# Altium PCB converter.PcbDoc
Units mm, origin at the board's own origin, x right, y up, seen from the top; angles counter-clockwise.
Board outline 60 x 70 mm, 2 copper layers (Top Layer, Bottom Layer), stack 1.671 mm thick; 16 components, 7 nets, 37 pads, 19 vias.
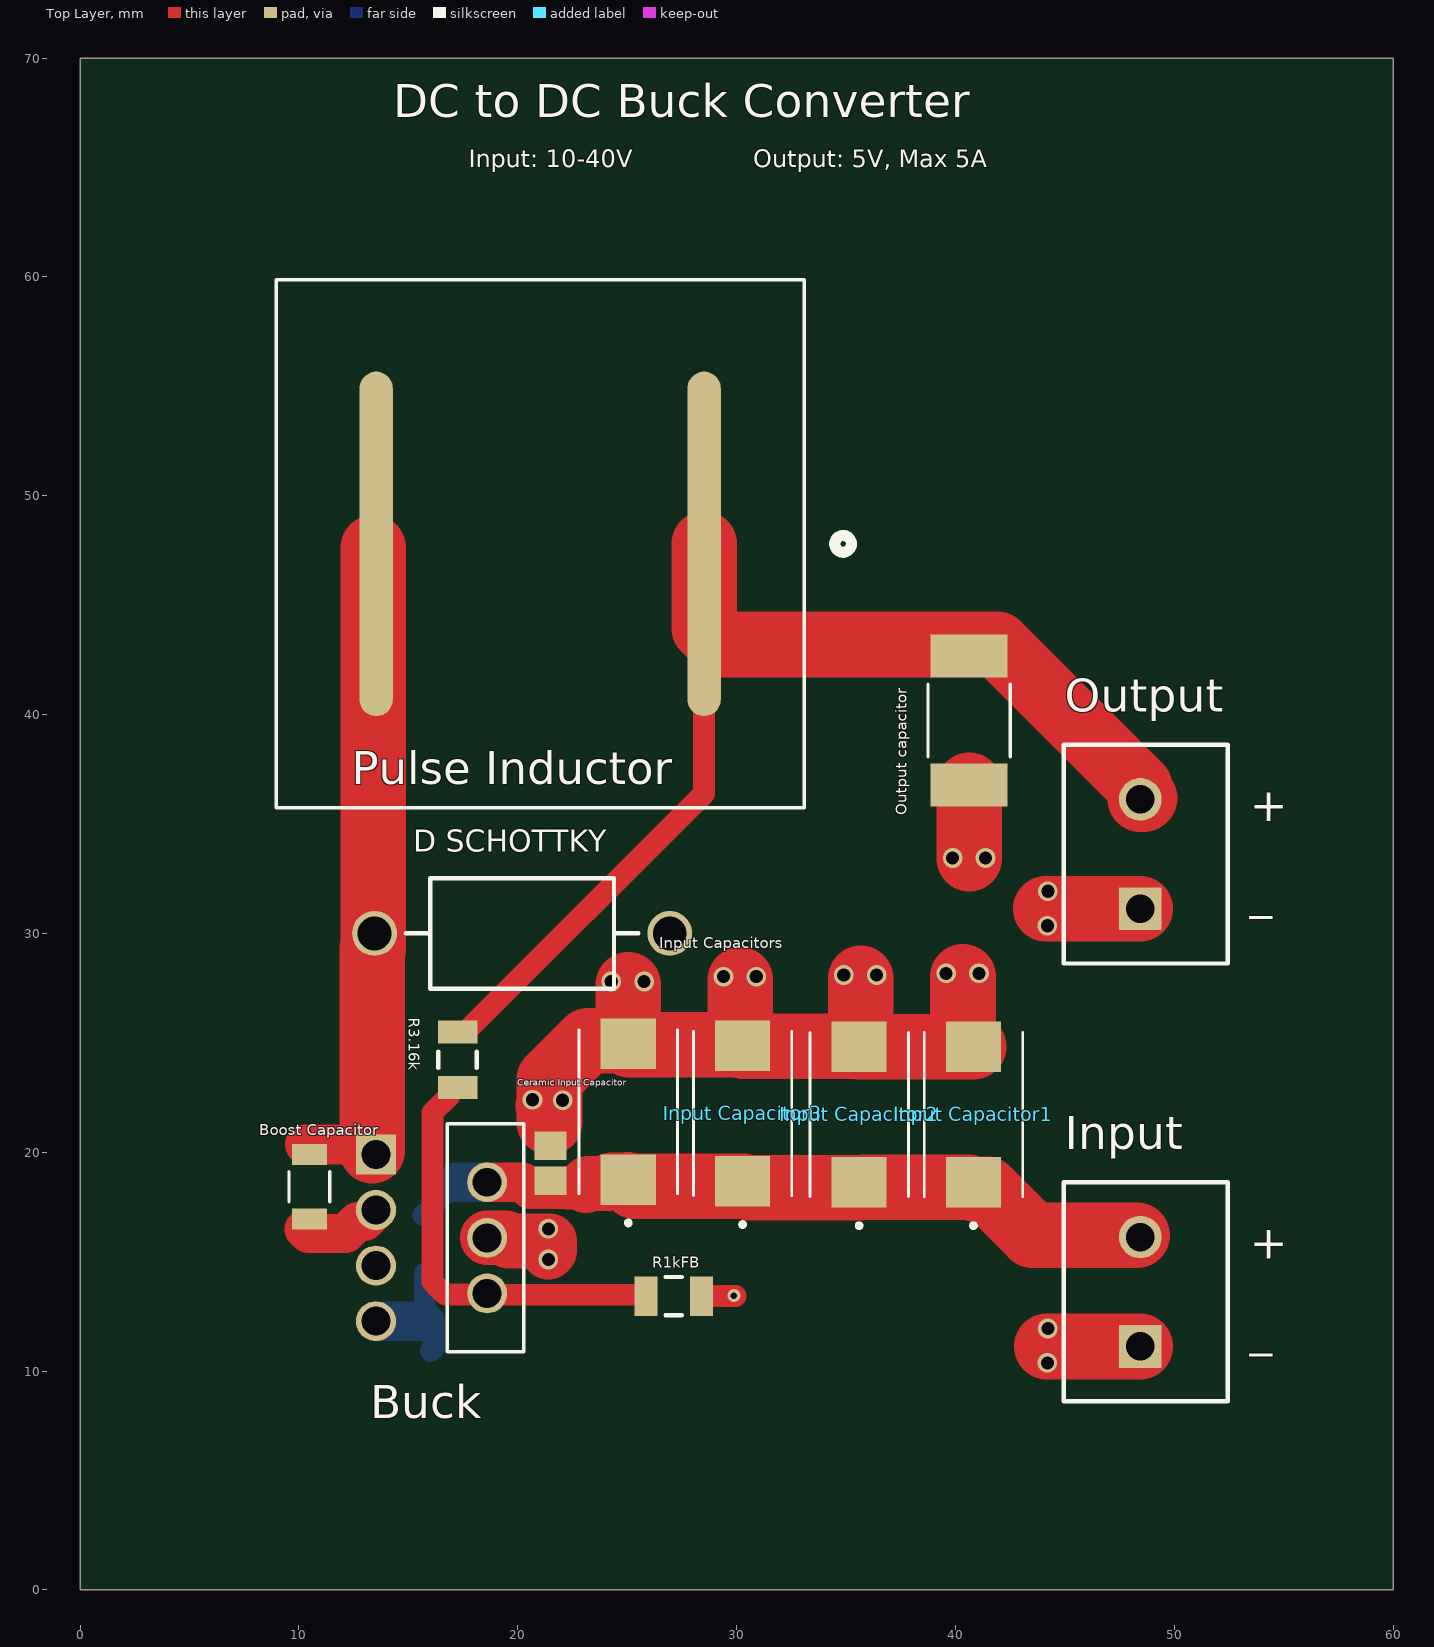
[diagram p0: Top Layer view]
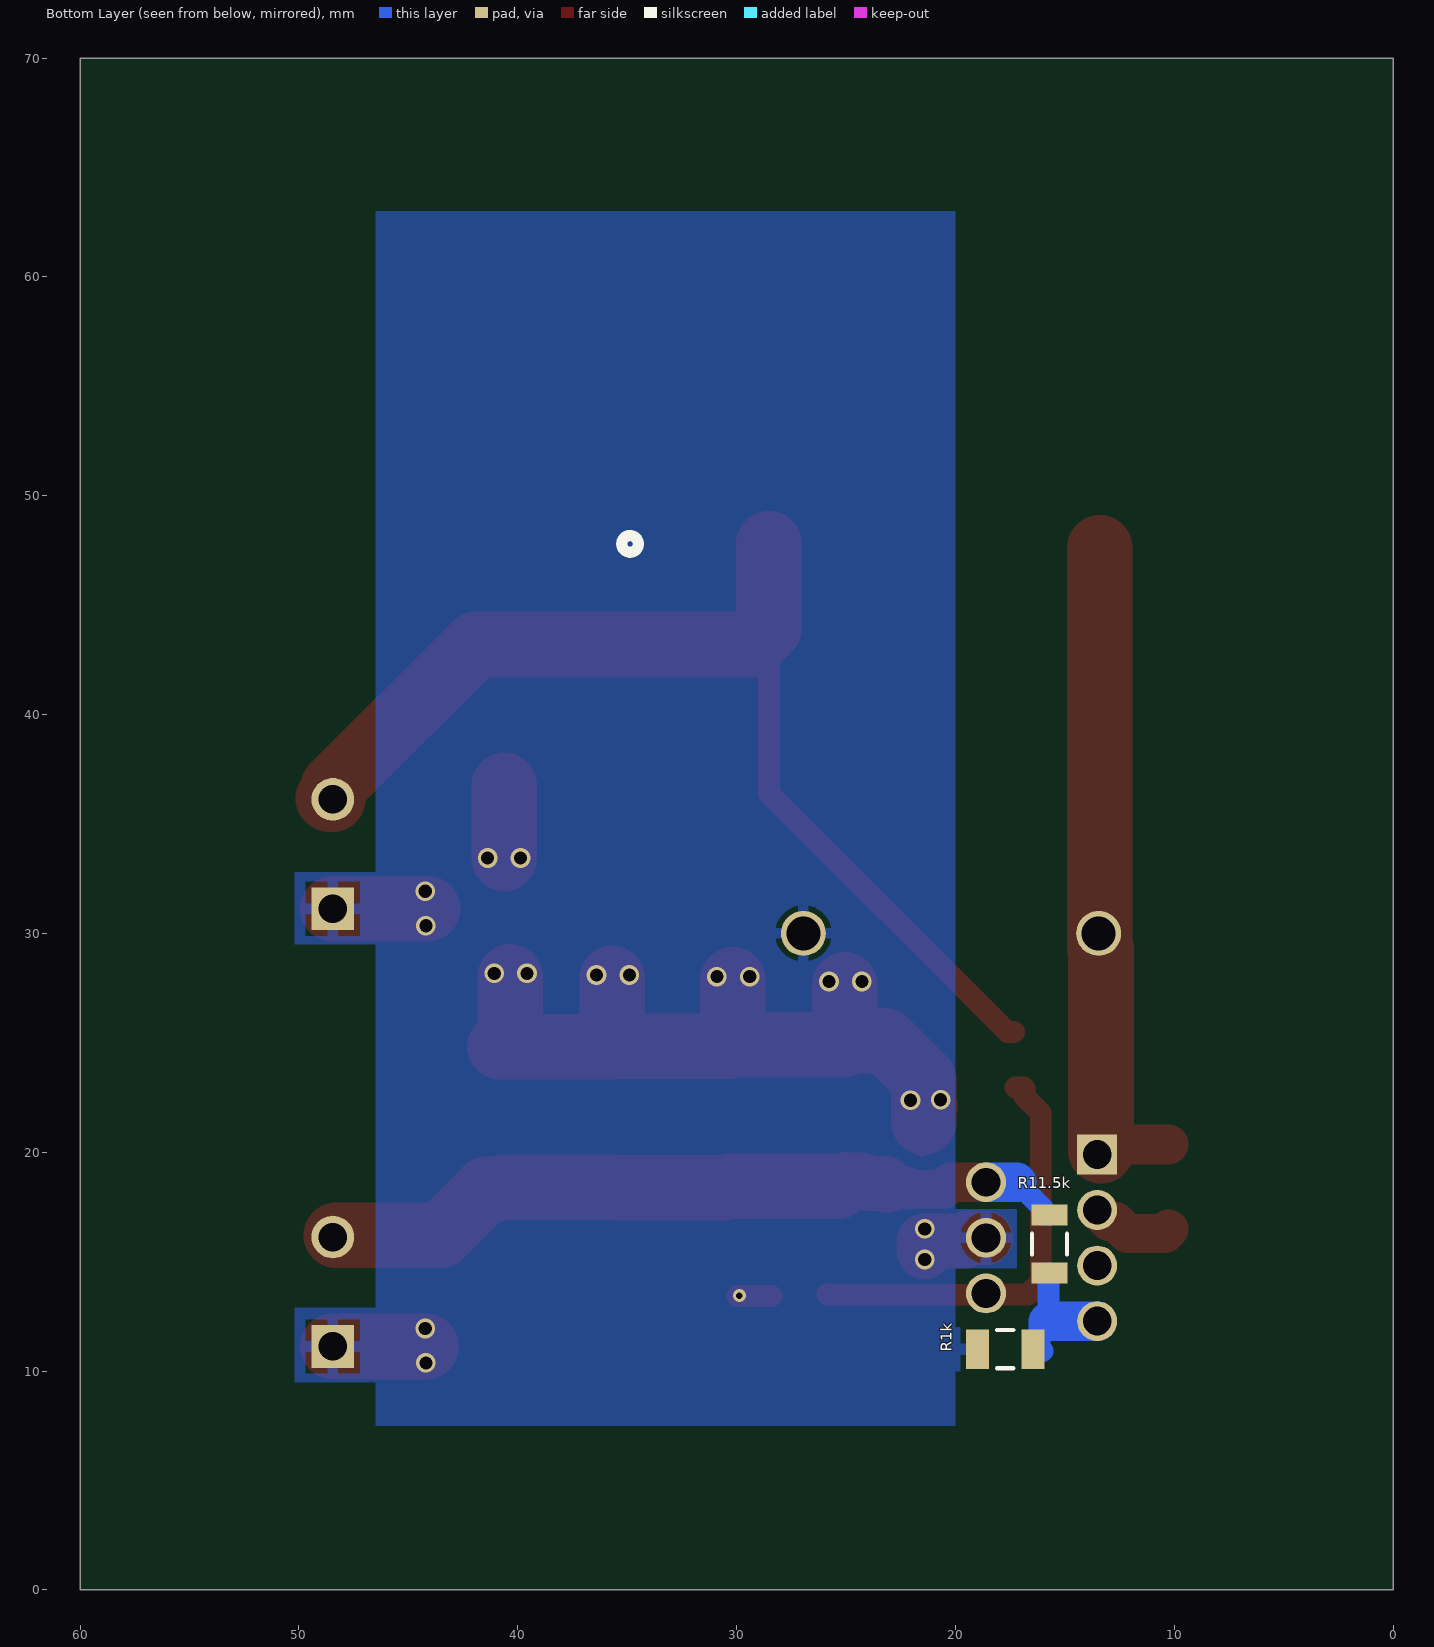
[diagram p1: Bottom Layer view, seen from below]

## Layer stack, top to bottom
Top Solder: solder mask 0.0102, Solder Resist, Dk 3.5
Top Layer: signal copper 0.0356
Dielectric 1: dielectric 1.6, FR-4, Dk 4.8
Bottom Layer: signal copper 0.0356
Bottom Solder: solder mask 0.0102, Solder Resist, Dk 3.5

## Board outline
0,70 60,70 60,0 0,0

## Design rules (kind name [scope] priority, off if disabled: settings)
BoardOutlineClearance [All] p1: gap=0.2 ignorepadtopadclearanceinfootprint=FALSE except(0.4: Arc-SplitBarrior Arc-SplitContinuation Track-SplitBarrior Track-SplitContinuation SMDPad-SplitBarrior SMDPad-SplitContinuation THPad-SplitBarrior THPad-SplitContinuation Via-SplitBarrior Via-SplitContinuation Fill-SplitBarrior Fill-SplitContinuation Poly-SplitBarrior Poly-SplitContinuation Region-SplitBarrior Region-SplitContinuation Text-SplitBarrior Text-SplitContinuation)
Clearance "Clearance Bottom Layer" [OnLayer('Bottom Layer')] p1: gap=0.203 ignorepadtopadclearanceinfootprint=TRUE except(0.254: Arc-Text Track-Text SMDPad-Text THPad-Text Via-Text Fill-Text Poly-Text Region-Text Text-Text)
Clearance "Clearance Top Layer" [OnLayer('Top Layer')] p2: gap=0.203 ignorepadtopadclearanceinfootprint=TRUE except(0.254: Arc-Text Track-Text SMDPad-Text THPad-Text Via-Text Fill-Text Poly-Text Region-Text Text-Text)
Clearance [All] p3: gap=0.2 ignorepadtopadclearanceinfootprint=FALSE except(0.089: Arc-Arc Arc-Track Arc-SMDPad Track-Track Track-SMDPad SMDPad-SMDPad; 0.127: Arc-Via Track-Via SMDPad-Via THPad-Via Via-Via; 0.254: Arc-Text Track-Text SMDPad-Text THPad-Text Via-Text Fill-Text Poly-Text Region-Text Text-Text)
HoleSize [All] p1: absolutevalues=TRUE maxlimit=6.3 minlimit=0.2 maxpercent=80.000 minpercent=20.000
MinimumAnnularRing [All] p1: minimumring=0.076
MinimumSolderMaskSliver [All] p1: minsoldermaskwidth=0.1
PolygonConnect PolygonConnect_1 [All] p1: thpad.connectstyle=Relief thpad.reliefconductorwidth=0.508 thpad.reliefentries=4 thpad.polygonreliefangle="90 Angle" thpad.airgapwidth=0.254 smdpad.connectstyle=Relief smdpad.reliefconductorwidth=0.508 smdpad.reliefentries=4 smdpad.polygonreliefangle="90 Angle" smdpad.airgapwidth=0.254 via.connectstyle=Direct via.reliefconductorwidth=0.508 via.reliefentries=4 via.polygonreliefangle="90 Angle" via.airgapwidth=0.254
RoutingCorners [All] p1: cornerstyle=Round minsetback=2.54 maxsetback=2.54
RoutingVias [All] p1: holewidth=0.5 width=1 viastyle="Through Hole" minholewidth=0.2 minwidth=0.45 maxholewidth=1 maxwidth=2
SilkToSilkClearance [All] p1: silktosilkclearance=0.1
SilkToSolderMaskClearance [IsPad] p1: minsilkscreentomaskgap=0.1 clearancetoexposedcopper=TRUE
SolderMaskExpansion [All] p1: expansion=0.102 istentingtop=FALSE
Width [All] p1: maxlimit=3 minlimit=0.089 preferedwidth=0.381 minimp=50.000000 maximp=50.000000 favimp=50.000000
25 further rules are at their usual default settings.

## Components (designator, comment, footprint, x,y, rotation, side; value= is the part's Value field where it differs from the comment)
"Boost Capacitor" "VJ1206Y103KXACW1BC" CAP_VJ1206_VIS 10.475,18.425 r90 top (schematic designator "Cboost capacitor")
Buck "LM2677T-ADJ/NOPB" TA07B 24.721,12.28 r270 top
"Ceramic Input Capacitor" "C0805C334K5RACAUTO" CAPC220145_100N_KEM 21.5,19.5 r90 top (schematic designator "Ceramic input capacitor")
"D SCHOTTKY" "80SQ045NRLG" ONSC-AXIAL_LEAD-2-267-05_V 20.2,30 r0 top
Input "691137710002" 691137710002 48.7,13.625 r90 top
"Input Capacitor1" "TPSE156K050R0250" CAPPM7343X310N 40.825,21.725 r90 top
"Input Capacitor2" "TPSE156K050R0250" CAPPM7343X310N 35.6,21.725 r90 top
"Input Capacitor3" "TPSE156K050R0250" CAPPM7343X310N 30.275,21.775 r90 top
"Input Capacitors" "TPSE156K050R0250" CAPPM7343X310N 25.05,21.85 r90 top (schematic designator "Input Capacitor4")
Output "691137710002" 691137710002 48.7,33.625 r90 top
"Output capacitor" "594D686X9010C2T" CAP_594D_C_VIS 40.625,39.725 r90 top
"Pulse Inductor" "PE-54041SNL" IND_HCI-68_PUL 21.025,47.8 r180 top
R1k "CRCW12061K00FKEAHP" FP-CRCW1206-HPe3-MFG 17.725,11 r180 bottom value=1kΩ
R1kFB "CRCW12061K00FKEAHP" FP-CRCW1206-HPe3-MFG 27.125,13.425 r180 top value=1kΩ
R3.16k "CRCW12063K16FKEA" FP-CRCW1206-e3-MFG 17.25,24.225 r90 top
R11.5k "CRCW120611K5FKEA" FP-CRCW1206-e3-IPC_C 15.7,15.8 r90 bottom

## Footprints (in the part's own frame and the unit in brackets; to place one, negate y for a bottom-side part, rotate by r counter-clockwise, add the part's x,y. Pads: shape width x height; smd on the part's side, far side on the other; paste and mask are expansions set on the pad)
691137710002 [mm] "Horizontal Cable Entry with Pressure Clamp, pitch 5mm, 02p"
  rect 1.95x1.95 hole 1.3: 1(-2.5,0.25)
  round 1.95 hole 1.3: 2(2.5,0.25)
  silkscreen extent -5,-3.75 5,3.75, body extent -5,-3.75 5,3.75, height 11.6
CAP_594D_C_VIS [mil]
  rect 77x138 smd paste+0 mask+0: 1(-116,0) 2(116,0)
  silkscreen extent -65,-74 65,74, body extent -141,-69 141,69, height 110
CAP_VJ1206_VIS [mil]
  rect 38x63 smd paste+0 mask+0: 1(-58,0) 2(58,0)
  silkscreen extent -27,-36 27,36, body extent -63,-31 63,31, height 63
CAPC220145_100N_KEM [mm]
  rect 1.306x1.45 smd paste+0 mask+0: 1(-0.803,0) 2(0.803,0)
  body extent -1.6,-0.8 1.6,0.8, height 1.6
CAPPM7343X310N [mm]
  rect 2.31x2.52 smd: 1(-3.1,0) 2(3.1,0)
  silkscreen extent -5.18,-2.25 3.75,2.25, body extent -3.57,-1.75 3.57,1.75, height 2.79
FP-CRCW1206-e3-IPC_C [mm]
  rect 0.956x1.658 smd paste+0 mask+0: 1(-1.326,0) 2(1.326,0)
  silkscreen extent -0.47,-0.8 0.47,0.8, body extent -1.6,-0.8 1.6,0.8, height 0.6
FP-CRCW1206-e3-MFG [mm]
  rect 1.05x1.8 smd paste+0 mask+0: 1(-1.275,0) 2(1.275,0)
  silkscreen extent -0.38,-0.87 0.38,0.87, body extent -1.6,-0.8 1.6,0.8, height 0.6
FP-CRCW1206-HPe3-MFG [mm]
  rect 1.05x1.8 smd paste+0 mask+0: 1(-1.275,0) 2(1.275,0)
  silkscreen extent -0.38,-0.87 0.38,0.87, body extent -1.6,-0.8 1.6,0.8, height 0.65
IND_HCI-68_PUL [mil]
  oval 60x620 smd paste+0 mask+0: 1(-295,0) 2(295,0)
  silkscreen extent -560,-475 475,475, body extent 0,0 10,10, height 10
ONSC-AXIAL_LEAD-2-267-05_V [mm] "AXIAL, 2-Leads, Diameter 5.05mm"
  round 2.05 hole 1.55: 1(-6.745,0) 2(6.745,0)
  silkscreen extent -5.32,-2.52 5.32,2.52
TA07B [mil]
  rect 72x72 hole 52: 1(-300,-441)
  round 72 hole 52: 2(-250,-241) 3(-200,-441) 4(-150,-241) 5(-100,-441) 6(-50,-241) 7(0,-441)
  silkscreen extent -355,-313 55,-175, body extent 0,0 10,10, height 10

## Part data
"Boost Capacitor": library part "Cboost capacitor", "Cap Ceramic 0.01uF 50V X7R 10% SMD 1206 125C Paper T/R", Capacitance=10nF, Case Code (Imperial)=1206, Case Code (Metric)=3216, Dielectric=X7R, Manufacturer=Vishay, Max Operating Temperature=125°C, Min Operating Temperature=-55°C, Package Quantity=4000, Supplier Part Number 1=720-1539-1-ND, Tolerance=10%, Voltage=50V, Case/Package=1206, Category="Ceramic Capacitors", ComponentLink1Description=https://datasheet.ciiva.com/178/vjw1bcbascomseries-178176.pdf?src-supplier=Digi-Key, ComponentLink1URL=https://datasheet.ciiva.com/178/vjw1bcbascomseries-178176.pdf?src-supplier=Digi-Key, ComponentLink2Description=https://datasheet.ciiva.com/17445/vjw1bcbascomseries-17445850.pdf?src-supplier=Avnet+Europe, ComponentLink2URL=https://datasheet.ciiva.com/17445/vjw1bcbascomseries-17445850.pdf?src-supplier=Avnet+Europe, ComponentLink3Description=https://datasheet.ciiva.com/16382/vjw1bcbascomseries-16382252.pdf?src-supplier=Future+Electronics, ComponentLink3URL=https://datasheet.ciiva.com/16382/vjw1bcbascomseries-16382252.pdf?src-supplier=Future+Electronics, Construction=Flat, Depth=1.6mm, Height=1.9mm, Length=3.2mm, Manufacturer Part Number=VJ1206Y103KXACW1BC, Mount="Surface Mount", Packaging="Tape and Reel", Pricing 1="1=0.30000, 10=0.20900, 50=0.13920, 100=0.11830, 500=0.08348, 1000=0.07305 (USD)", Radiation Hardening=No, RoHS=Yes, RoHS Compliant=Yes, Series=VJ, Stock 1=755, Supplier 1=Digi-Key, Termination=SMD/SMT, Thickness=0.037inch, Voltage Rating=50V, Voltage Rating (DC)=50V, Width=0.063inch
Buck: "IC REG BUCK ADJ 5A TO220-7", Case/Package=TO-220, Manufacturer="TI National Semiconductor", Max Input Voltage=40V, Max Operating Temperature=125°C, Max Output Current=5A, Max Output Voltage=37V, Min Input Voltage=8V, Min Operating Temperature=-40°C, Min Output Voltage=1.21V, Package Quantity=45, Quiescent Current=4.2mA, Supplier Part Number 1=LM2677T-ADJ/NOPB-ND, Switching Frequency=260kHz, Category="Voltage Regulators - Switching", ComponentLink1Description=https://datasheet.ciiva.com/6603/lm2677-6603725.pdf?src-supplier=Digi-Key, ComponentLink1URL=https://datasheet.ciiva.com/6603/lm2677-6603725.pdf?src-supplier=Digi-Key, Efficiency=84%, Height=8.69mm, Lead Free="Lead Free", Length=10.16mm, Manufacturer Part Number=LM2677T-ADJ/NOPB, Mount="Through Hole", Number of Outputs=1, Number of Pins=7, Operating Supply Voltage=40V, Output Configuration=Positive, Output Current=5A, Output Type=Adjustable, Output Voltage=37V, Packaging=Rail/Tube, Pricing 1="1=6.95000, 10=6.24400, 25=5.90280, 100=5.11580, 250=4.85348, 500=4.35500, 1000=4.33125 (USD)", Radiation Hardening=No, RoHS=Yes, RoHS Compliant=Yes, Series="SIMPLE SWITCHER®", Stock 1=20, Supplier 1=Digi-Key, Synchronous Rectifier=No, Width=4.57mm
"Ceramic Input Capacitor": "Cap Ceramic 0.33uF 50V X7R 10% SMD 0805 125C Paper T/R", Capacitance=330nF, Case Code (Imperial)=0805, Case Code (Metric)=2012, Dielectric=X7R, Dielectric Material=Ceramic, Manufacturer=KEMET, Max Operating Temperature=125°C, Min Operating Temperature=-55°C, Package Quantity=1, Ratings=AEC-Q200, Supplier Part Number 1=399-6959-1-ND, Tolerance=10%, Voltage Rating=50V, Case/Package=0805, Category="Ceramic Capacitors", ComponentLink1Description=https://datasheet.ciiva.com/7842/1776105-7842326.pdf?src-supplier=Element14, ComponentLink1URL=https://datasheet.ciiva.com/7842/1776105-7842326.pdf?src-supplier=Element14, ComponentLink2Description=https://datasheet.ciiva.com/22705/1776105-22705463.pdf?src-supplier=Element14, ComponentLink2URL=https://datasheet.ciiva.com/22705/1776105-22705463.pdf?src-supplier=Element14, Construction=Flat, Contact Plating=Tin,Matte, Depth=1.25mm, Height=0.9mm, Length=2mm, Manufacturer Part Number=C0805C334K5RACAUTO, Mount="Surface Mount", Packaging="Tape and Reel", Pricing 1="1=0.21000, 10=0.14400, 50=0.08660, 100=0.07320, 500=0.05004, 1000=0.04428 (USD)", Radiation Hardening=No, REACH SVHC="No SVHC", RoHS=Yes, Series=C, Stock 1=7177, Supplier 1=Digi-Key, Termination=SMD/SMT, Thickness=0.039inch, Voltage Rating (DC)=50V, Width=0.049inch
"D SCHOTTKY": library part CMP-1055-00003-1, "Rectifier, 2-Pin Axial_Lead, Pb-Free, Tape and Reel", Manufacturer="On Semiconductor", ComponentLink1Description="Manufacturer URL", ComponentLink1URL=http://www.onsemi.com/, ComponentLink2Description=Datasheet, ComponentLink2URL=http://www.onsemi.cn/pub_link/Collateral/80SQ045N-D.PDF, ComponentLink3Description="Package Specification", ComponentLink3URL=http://www.onsemi.com/pub_link/Collateral/267-05.PDF, Configuration=Single, DatasheetVersion="Rev. 3", IFSM Max (A)=140, Mounting Technology="Through Hole", PackageDescription="2-Pin, Axial Lead, Diameter 5.05 mm", PackageReference=AXIAL_LEAD-2-267-05, PackageVersion="Rev. G, 06/2000", Packing="Tape and Reel", PartNumber=80SQ045NRLG, RoHS=TRUE
Input Output: library part CMP-1502-03324-1, "Series 1377 - 5.00 mm Horizontal Entry with Pressure Clamp WR-TBL, 2 pin", Manufacturer="Wurth Elektronik", Operating Temperature=-30to120degC, Datasheet URL=http://katalog.we-online.de/pbs/datasheet/691137710002.pdf, Manufacturer URL=http://www.we-online.de, Mounting Technology=THT, Package Reference=691137710002, Packaging=Box, Part Number=691137710002, Pin Number=2, Pitch=5.00mm, Publisher=WurthElektronik
"Input Capacitor1" "Input Capacitor2" "Input Capacitor3" "Input Capacitors": library part "Input Capacitor", "AVX - TPSE156K050R0250 - Surface Mount Tantalum Capacitor, 15 µF, 50 V, 2917 [7343 Metric], TPS Series, ± 10%, -55 °C", Capacitance=15uF, Case Code (Imperial)=2917, Case Code (Metric)=7343, Case/Package=7343-43, Dielectric Material=Tantalum, ESR (Equivalent Series Resistance)=250mR, Leakage Current=5uA, Manufacturer="Kyocera AVX", Max Operating Temperature=125°C, Min Operating Temperature=-55°C, Package Quantity=1, Ripple Current=325uA, Supplier Part Number 1=478-3112-1-ND, Tolerance=10%, Voltage=50V, Category="Tantalum Capacitors", ComponentLink1Description=https://datasheet.ciiva.com/27052/1408147-27052202.pdf?src-supplier=Jameco, ComponentLink1URL=https://datasheet.ciiva.com/27052/1408147-27052202.pdf?src-supplier=Jameco, ComponentLink2Description=https://datasheet.ciiva.com/26915/getdatasheetpartid-113553-26915162.pdf?src-supplier=Verical, ComponentLink2URL=https://datasheet.ciiva.com/26915/getdatasheetpartid-113553-26915162.pdf?src-supplier=Verical, ComponentLink3Description=https://datasheet.ciiva.com/26341/806578-da-01-en-smd-tantal15uf-50v-10-0-250r-400st-26341830.pdf?src-supplier=Conrad, ComponentLink3URL=https://datasheet.ciiva.com/26341/806578-da-01-en-smd-tantal15uf-50v-10-0-250r-400st-26341830.pdf?src-supplier=Conrad, ComponentLink4Description=https://datasheet.ciiva.com/266/tps-266035.pdf?src-supplier=Digi-Key, ComponentLink4URL=https://datasheet.ciiva.com/266/tps-266035.pdf?src-supplier=Digi-Key, ComponentLink5Description=https://datasheet.ciiva.com/266/tps-266036.pdf?src-supplier=Digi-Key, ComponentLink5URL=https://datasheet.ciiva.com/266/tps-266036.pdf?src-supplier=Digi-Key, ComponentLink6Description=https://datasheet.ciiva.com/266/tps-266037.pdf?src-supplier=Digi-Key, ComponentLink6URL=https://datasheet.ciiva.com/266/tps-266037.pdf?src-supplier=Digi-Key, ComponentLink7Description=https://datasheet.ciiva.com/11230/tps-11230204.pdf?src-supplier=Avnet, ComponentLink7URL=https://datasheet.ciiva.com/11230/tps-11230204.pdf?src-supplier=Avnet, ComponentLink8Description=https://datasheet.ciiva.com/12882/tps-23028-12882493.pdf?src-supplier=Mouser, ComponentLink8URL=https://datasheet.ciiva.com/12882/tps-23028-12882493.pdf?src-supplier=Mouser, ComponentLink9Description=https://datasheet.ciiva.com/17339/tps-17339833.pdf?src-supplier=Avnet+Europe, ComponentLink9URL=https://datasheet.ciiva.com/17339/tps-17339833.pdf?src-supplier=Avnet+Europe, ComponentLink10Description=https://datasheet.ciiva.com/16374/tps-16374888.pdf?src-supplier=Future+Electronics, ComponentLink10URL=https://datasheet.ciiva.com/16374/tps-16374888.pdf?src-supplier=Future+Electronics, ComponentLink11Description=https://datasheet.ciiva.com/7914/1680477-7914799.pdf?src-supplier=Element14, ComponentLink11URL=https://datasheet.ciiva.com/7914/1680477-7914799.pdf?src-supplier=Element14, ComponentLink12Description=https://datasheet.ciiva.com/14593/70001047-14593093.pdf?src-supplier=Allied+Electronics, ComponentLink12URL=https://datasheet.ciiva.com/14593/70001047-14593093.pdf?src-supplier=Allied+Electronics, ComponentLink13Description=https://datasheet.ciiva.com/14605/70001047-14605032.pdf?src-supplier=Allied+Electronics, ComponentLink13URL=https://datasheet.ciiva.com/14605/70001047-14605032.pdf?src-supplier=Allied+Electronics, Construction=Flat, Depth=4.3mm, Dissipation Factor=6%, Features="General Purpose", Height=4.1mm, Height - Seated (Max)=0.169inch, Lead Free="Lead Free", Lead Pitch=4.4mm, Length=7.3mm, Manufacturer Part Number=TPSE156K050R0250, Mount="Surface Mount,PCB", Number of Pins=2, Packaging="Tape and Reel", Polarity=Polar, Pricing 1="1=2.43000, 10=1.96800, 50=1.71740, 100=1.50270 (USD)", Radiation Hardening=No, REACH SVHC="No SVHC", RoHS=Yes, RoHS Compliant=Yes, Series=TPS, Stock 1=13, Supplier 1=Digi-Key, Termination=SMD/SMT, Voltage Rating=50V, Voltage Rating (DC)=50V, Width=4.3mm
"Output capacitor": library part "Output capacitor", "CAPACITOR TANT, 68UF, 10V, 0.1 OHM, 0.1, SMD; Capacitance:68µF; Capacitance Tolerance:± 10%; Capacitor Dielectric Type:Tantalum; Capacitor Mounting:SMD; Capacitor Terminals:SMD; ESR:0.1ohm; Filter Terminals:Surface Mount ;RoHS Compliant: Yes", Capacitance=68uF, Case Code (Imperial)=2812, Case Code (Metric)=7132, Dielectric Material=Tantalum, ESR (Equivalent Series Resistance)=100mR, Leakage Current=6.8uA, Manufacturer="Vishay Sprague", Max Operating Temperature=125°C, Min Operating Temperature=-55°C, Package Quantity=500, Ripple Current=1.05A, Supplier Part Number 1=718-594D686X9010C2TCT-ND, Tolerance=10%, Voltage=10V, Case/Package=2812, Category="Tantalum Capacitors", ComponentLink1Description=https://datasheet.ciiva.com/11793/0900766b80d97c0f-11793961.pdf?src-supplier=RSComponents, ComponentLink1URL=https://datasheet.ciiva.com/11793/0900766b80d97c0f-11793961.pdf?src-supplier=RSComponents, ComponentLink2Description=https://datasheet.ciiva.com/274/594d-274120.pdf?src-supplier=Digi-Key, ComponentLink2URL=https://datasheet.ciiva.com/274/594d-274120.pdf?src-supplier=Digi-Key, ComponentLink3Description=https://datasheet.ciiva.com/3004/594d-3004965.pdf?src-supplier=Avnet, ComponentLink3URL=https://datasheet.ciiva.com/3004/594d-3004965.pdf?src-supplier=Avnet, ComponentLink4Description=https://datasheet.ciiva.com/3004/594d-3004966.pdf?src-supplier=Avnet, ComponentLink4URL=https://datasheet.ciiva.com/3004/594d-3004966.pdf?src-supplier=Avnet, ComponentLink5Description=https://datasheet.ciiva.com/16632/594d-16632071.pdf?src-supplier=Avnet+Europe, ComponentLink5URL=https://datasheet.ciiva.com/16632/594d-16632071.pdf?src-supplier=Avnet+Europe, ComponentLink6Description=https://datasheet.ciiva.com/16359/594d-16359591.pdf?src-supplier=Future+Electronics, ComponentLink6URL=https://datasheet.ciiva.com/16359/594d-16359591.pdf?src-supplier=Future+Electronics, ComponentLink7Description=https://datasheet.ciiva.com/1463/438286-1463899.pdf?src-supplier=Element14, ComponentLink7URL=https://datasheet.ciiva.com/1463/438286-1463899.pdf?src-supplier=Element14, ComponentLink8Description=https://datasheet.ciiva.com/18444/70212531-18444348.pdf?src-supplier=Allied+Electronics, ComponentLink8URL=https://datasheet.ciiva.com/18444/70212531-18444348.pdf?src-supplier=Allied+Electronics, Construction=Flat, Depth=3.2mm, Dissipation Factor=6%, Features="General Purpose", Height=2.5mm, Height - Seated (Max)=0.11inch, Lead Free="Lead Free", Length=7.1mm, Manufacturer Part Number=594D686X9010C2T, Mount="Surface Mount,PCB", Number of Pins=2, Packaging="Tape and Reel", Polarity=Polar, Pricing 1="1=3.14000, 10=2.54100, 50=2.21760, 100=1.94040 (USD)", REACH SVHC=Unknown, RoHS=Yes, RoHS Compliant=Yes, Series=594D, Stock 1=706, Supplier 1=Digi-Key, Termination=SMD/SMT, Voltage Rating=10V, Voltage Rating (DC)=10V, Width=0.126inch
"Pulse Inductor": "Inductor Power Wirewound 25uH 20% 3A 40mOhm DCR", Case/Package=SMD/SMT, Current Rating=3A, DC Resistance (DCR)=40mR, Inductance=25uH, Manufacturer=Pulse, Max Operating Temperature=130°C, Min Operating Temperature=-40°C, Package Quantity=30, Supplier Part Number 1=553-1424-ND, Tolerance=20%, Category="Fixed Inductors", ComponentLink1Description=http://www.mouser.com/ds/2/336/-268328.pdf?src-supplier=Mouser, ComponentLink1URL=http://www.mouser.com/ds/2/336/-268328.pdf?src-supplier=Mouser, ComponentLink2Description=http://components.arrow.com/part/dataview/42118542S8144333N6149?src-supplier=Arrow+Electronics, ComponentLink2URL=http://components.arrow.com/part/dataview/42118542S8144333N6149?src-supplier=Arrow+Electronics, ComponentLink3Description=http://components.arrow.com/part/dataview/0323_01095901?src-supplier=Arrow+Europe, ComponentLink3URL=http://components.arrow.com/part/dataview/0323_01095901?src-supplier=Arrow+Europe, ComponentLink4Description=http://productfinder.pulseeng.com/products/datasheets/SPM2007_47.pdf?src-supplier=Avnet, ComponentLink4URL=http://productfinder.pulseeng.com/products/datasheets/SPM2007_47.pdf?src-supplier=Avnet, ComponentLink5Description=http://productfinder.pulseeng.com/products/datasheets/SPM2007_47.pdf?src-supplier=Digi-Key, ComponentLink5URL=http://productfinder.pulseeng.com/products/datasheets/SPM2007_47.pdf?src-supplier=Digi-Key, ComponentLink6Description=http://ww2.pulseeng.com/products/datasheets/SPM2007_47.pdf?src-supplier=Avnet+Europe, ComponentLink6URL=http://ww2.pulseeng.com/products/datasheets/SPM2007_47.pdf?src-supplier=Avnet+Europe, ComponentLink7Description=https://www.verical.com/server-webapp/html/getDatasheet?partID=180366&src-supplier=Verical, ComponentLink7URL=https://www.verical.com/server-webapp/html/getDatasheet?partID=180366&src-supplier=Verical, DC Current=3A, Depth=17.02mm, Height=0.39inch, Lead Free="Lead Free", Length=17.78mm, Manufacturer Part Number=PE-54041SNL, Max DC Current=3A, Military Standard=Not, Mount="Surface Mount", Packaging=Bulk, Pricing 1="1=3.03000, 10=2.77800, 25=2.52480, 50=2.12100, 100=1.81800, 250=1.71700, 500=1.61600, 1000=1.51500, 2500=1.46450 (USD)", Radiation Hardening=No, RoHS=Yes, RoHS Compliant=Yes, Series=LCI, Shielding=Unshielded, Stock 1=95, Supplier 1=Digi-Key, Termination=SMD/SMT, Width=0.67inch
R1k R1kFB: library part CMP-2003-04874-2, "RES SMD 1K OHM 1% 3/4W 1206", Manufacturer=Vishay, Package=CRCW1206-HPe3, Power Rating=0.75W, Resistance=1kΩ, Temperature="-55°C to +155°C", Temperature Coefficient=100ppm/°C, Temperature Range High=+155°C, Temperature Range Low=-55°C, Tolerance=1%, Voltage Rating=200V, Automotive=Yes, Automotive Grade="Grade 0", Category=Res, ComponentLink2Description=Datasheet, ComponentLink2URL=http://www.vishay.com/docs/20043/crcwhpe3.pdf, Composition="Thick Film", Device Class L1="Passive Components", Device Class L2=Resistors, Device Class L3="Chip SMD Resistors", Digikey Description="RES SMD 1K OHM 1% 3/4W 1206", Height=0.65mm, Ipc Land Pattern Name=RESC310160X50, Lead Free=Yes, Manufacturer Part Number=CRCW12061K00FKEAHP, Mouser Description="Res Thick Film 1206 1K Ohm 1% 0.75W ±100ppm/°C Molded SMD SMD Paper T/R", Octopart=https://octopart.com/crcw12061k00fkeahp-vishay-42635114, RoHS=TRUE, Series="CRCW-HP e3"
R3.16k: library part CMP-2003-02148-2, "RES Thick Film, 3.16kΩ, 1%, 0.25W, 100ppm/°C, 1206", Case Code (Imperial)=1206, Case Code (Metric)=3216, Max Operating Temperature=155°C, Max Power Dissipation=250mW, Min Operating Temperature=-55°C, Package Quantity=10, Resistance=3.16kR, Temperature Coefficient=100ppm/°C, Tolerance=1%, Voltage Rating=200V, Case/Package=1206, Composition="Thick Film", Contact Plating=Tin, Depth=1.6mm, Features="Automotive AEC-Q200", Height=0.55mm, Lead Free="Lead Free", Length=3.2mm, Military Standard=Not, Mount="Surface Mount", Number of Pins=2, Number of Terminations=2, Packaging="Tape and Reel", Power Rating=250mW, Radiation Hardening=No, Termination=SMD/SMT, Voltage Rating (DC)=200V, Weight=0.000353oz, Width=1.6mm, Working Voltage=200V
R11.5k: library part CMP-2003-04832-2, "RES Thick Film, 11.5kΩ, 1%, 0.25W, 100ppm/°C, 1206", Case Code (Imperial)=1206, Case Code (Metric)=3216, Max Operating Temperature=155°C, Max Power Dissipation=250mW, Min Operating Temperature=-55°C, Package Quantity=10, Resistance=11.5kR, Temperature Coefficient=100ppm/°C, Tolerance=1%, Voltage Rating=200V, Case/Package=1206, Composition="Thick Film", Contact Plating=Tin, Depth=1.6mm, Features="Automotive AEC-Q200", Height=0.024inch, Lead Free="Lead Free", Length=3.2mm, Military Standard=Not, Number of Pins=2, Number of Terminations=2, Packaging="Tape and Reel", Power Rating=250mW, Radiation Hardening=No, Termination=SMD/SMT, Voltage Rating (DC)=200V, Weight=0.000353oz, Width=1.6mm

## Via types
v1: diameter 0.9, hole 0.6, Top Layer to Bottom Layer, 18 vias
v2: diameter 0.6, hole 0.3, Top Layer to Bottom Layer, 1 vias

## Nets (pads, with @x,y where several pads share a name; then routed paths per layer and width w, separated by ;. In a path a pad name is that pad's centre, name@x,y a point inside that pad or via, vN(x,y) a via of type N, cw(c..) or ccw(c..) an arc to the next point about the centre after c; other vN are vias at no path point)
NetBUCK_1: "Boost Capacitor.2" "D SCHOTTKY.1" "Pulse Inductor.2" Buck.1 | length 31
  Top Layer w1.83: 10.275,20.35 13.07,20.35 13.35,20.07 Buck.1
  Top Layer w3: Buck.1@13.35,20.07 13.35,29.3 ; 13.4,29.275 13.4,47.625
NetBUCK_2: "Ceramic Input Capacitor.1" "Input Capacitor1.1" "Input Capacitor2.1" "Input Capacitor3.1" "Input Capacitors.1" Buck.2 Input.2 R11.5k.2 | length 37.3
  Top Layer w1: 21.5,18.697 21.825,18.372 ; Input.2@48.375,16.125 Input.2
  Top Layer w1.3: 21.825,18.372 22.325,18.372
  Top Layer w1.8: Buck.2 20.235,18.63 20.565,18.3 25.1,18.3
  Top Layer w2: 22.325,18.372 22.649,18.372 22.76,18.484 23.114,18.484
  Top Layer w2.5: 23.114,18.484 23.202,18.572 24.091,18.572 24.258,18.74 25.04,18.74 ; 25.05,18.75 25.05,18.71 25.06,18.7
  Top Layer w3: 25.35,18.45 30.325,18.45 ; 30.575,18.375 35.625,18.375 ; 35.825,18.4 40.6,18.4 ; 41,18.3 41.425,18.3 43.525,16.2 Input.2@48.3,16.2
  Bottom Layer w1: R11.5k.2 15.722,17.148 16.029,17.148 16.029,17.455 17.198,18.624
  Bottom Layer w1.8: 17.198,18.624 18.594,18.624 Buck.2
NetBUCK_3: "Boost Capacitor.1" Buck.3 | length 3.8
  Top Layer w1.8: 10.25,16.475 10.436,16.289 12.136,16.289 12.684,16.838 12.99,16.838 13.512,17.36 Buck.3
NetBUCK_4: "Ceramic Input Capacitor.2" "D SCHOTTKY.2" "Input Capacitor1.2" "Input Capacitor2.2" "Input Capacitor3.2" "Input Capacitors.2" "Output capacitor.1" Buck.4 Input.1 Output.1 R1k.1 R1kFB.1 | length 51.3
  Top Layer w1: 21.45,21.375 21.45,20.353 21.5,20.303 ; R1kFB.1 v2@29.95,13.425 ; 40.625,33.425 40.65,33.4
  Top Layer w2.5: Buck.4 19.447,16.09 19.59,15.947 21.453,15.947 21.453,15.494 v1@21.4,15.441
  Top Layer w3: 21.4,22.1 21.45,22.05 ; 21.45,21.375 21.45,22.05 ; 25.05,24.95 25.05,25.1 ; 25.05,27.65 25.05,25.1 ; 25.087,24.912 30.237,24.912 ; 25.2,25.2 25.1,25.1 25.05,25.1 ; 30.175,25.175 30.175,27.875 ; 30.3,24.85 35.575,24.85 ; 35.6,24.825 40.825,24.825 ; 35.675,25.25 35.675,27.95 ; 40.35,25.325 40.35,28.025 ; 40.625,33.425 40.625,36.779 ; 44.125,31.125 Output.1 ; 44.175,11.125 Input.1 ; 21.45,22.05 21.45,23.343 23.207,25.1 25.05,25.1
  Bottom Layer w1: Buck.4 Buck.4@18.824,16.09
  other v1: 44.2,10.375 44.225,11.95 21.4,15.1 21.4,16.5 22.05,22.375 20.675,22.4 24.275,27.8 25.775,27.8 29.4,28.025 30.9,28.025 34.9,28.1 36.4,28.1 39.575,28.175 41.075,28.175 44.2,30.35 44.225,31.925 39.875,33.45 41.375,33.45
  other v2: 29.875,13.45
NetBUCK_6: Buck.6 R1kFB.2 R3.16k.1 | length 19.7
  Top Layer w1: R3.16k.1 16.875,22.95 16.85,22.925 16.85,22.55 16.1,21.8 16.1,14.086 16.686,13.5 Buck.6@18.65,13.5 ; Buck.6 Buck.6@18.65,13.5 ; R1kFB.2@25.85,13.525 25.85,13.512 25.825,13.487 18.662,13.487 Buck.6@18.65,13.5
NetBUCK_7: Buck.7 R1k.2 R11.5k.1 | length 5.8
  Bottom Layer w1: 15.75,12.25 R11.5k.1@15.75,14.452 ; R1k.2@16.025,10.925 16.15,11.05 16.15,12.274
  Bottom Layer w1.8: Buck.7 13.526,12.274 15.726,12.274 15.75,12.25
"NetOutput capacitor_2": "Output capacitor.2" "Pulse Inductor.1" Output.2 R3.16k.2 | length 50.6
  Top Layer w1: R3.16k.2@17.325,25.5 17.625,25.5 28.518,36.393 28.518,43.938 ; 40.525,42.771 40.625,42.671
  Top Layer w3: 28.518,47.8 28.518,43.938 29.256,43.2 41.925,43.2 48.425,36.7 Output.2@48.425,36.5 ; Output.2 48.6,36.125 Output.2@48.65,36.175
pads on no net: Buck.5

## Polygon pours and split planes (outlines as drawn)
no net on Layer0 "Default Coverlay 1 Top" (split plane): 0,70 60,70 60,0 0,0
no net on Layer0 "Default Coverlay 1 Bottom" (split plane): 0,70 60,70 60,0 0,0
NetBUCK_4 on Bottom Layer "NETBUCK_4_L02_P002" (solid, pour order 2): 20,7.5 20,10 18.5,10 18.5,12 20,12 20,14.7 17.2,14.7 17.2,17.4 20,17.4 20,63 46.5,63 46.5,32.8 50.2,32.8 50.2,29.5 46.5,29.5 46.5,12.9 50.2,12.9 50.2,9.5 46.5,9.5 46.5,7.5

## Silkscreen, mask and mechanical layers (free items; w line width, h text height)
Top Overlay:
  text "DC to DC Buck Converter" at 14.3,67.3 h1.52
  text "Input: 10-40V" at 17.754,65.021 h0.8
  text "Output: 5V, Max 5A" at 30.754,65.021 h0.8
  text "+" at 53.454,35.125 h1.52
  text "_" at 53.454,31.133 h1.52
  text "+" at 53.454,15.125 h1.52
  text "_" at 53.454,11.133 h1.52
Board Outline:
  the board outline again, w0.2

## Text inside footprints (layer, text, board x,y; h text height)
"Ceramic Input Capacitor": Mechanical 7 "0.03in/0.75mm" at 25.908,18.061 h0.64 r90; Mechanical 7 "0.087in/2.2mm" at 17.727,17.436 h0.64 r90